# EAGLE board 1020-old (EAGLE 9.5.2)

Size 62 x 17 mm. Coordinates in mm from the lower left corner, seen from the top.
Outline: 0,1.15 12,1.15 12,0.6 19,0.6 19,0 27,0 27,0.6 51.5,0.6 51.5,1.15 62,1.15 62,15.85 51.5,15.85 51.5,16.4 27,16.4 27,17 19,17 19,16.4 12,16.4 12,15.85 0,15.85 0,1.15
Copper layers (1*16): Top 0.035mm / dielectric 1.5mm / Bottom 0.035mm
Design rules "default *": minimum track width 6mil, minimum drill 0.35mm, track to track 6mil, track to pad 6mil, pad to pad 6mil, via to via 6mil, smd to smd 6mil, copper to edge 6mil, drill to drill 6mil, minimum pad ring 10mil, minimum via ring 8mil, stop-mask expansion 4mil, vias tented up to drill 0mil, thermal gap 10mil
Holes 2 mm at 14,4 14.5,15 48,13 21,3 23,3 25,3 21,14 23,14 25,14

## Footprints (pad centres in the part's own frame; a part is rotated, then mirrored left to right if it is on the bottom)
SOIC-4 = smd 1.2 x 1.2: + 1.3,3.05; - -1.3,3.05; ~1 -1.3,-3.05; ~2 1.3,-3.05
C0805 = smd 1.3 x 1.5: 1 -0.95,0; 2 0.95,0
CT3528 = smd 2 x 2.2: + -1.5,0; - 1.5,0
DUOLED-A-3MM = drill 0.8 pad 1.4: 1 -2.54,0; 2 0,0; 3 2.54,0
SOT89 = smd 1 x 1.5: 1 -1.499,-1.981; 3 1.499,-1.981 | smd 1 x 2: 2 0,-1.727 | smd 2.2 x 3.7: 2@1 0,0.94
SOP8 = smd 0.6 x 1.6: 1 -1.905,-2.6; 2 -0.635,-2.6; 3 0.635,-2.6; 4 1.905,-2.6; 5 1.905,2.6; 6 0.635,2.6; 7 -0.635,2.6; 8 -1.905,2.6
1X03 = drill 1.016 pad 1.88: 1 0,0; 2 2.54,0; 3 5.08,0
SMD2,54-5,08 = smd 2.54 x 5.08: 1 0,0
R0805 = smd 1.3 x 1.5: 1 -0.95,0; 2 0.95,0
SOIC127P600X175-14N = smd 1.95 x 0.59: 1 -2.48,3.81; 2 -2.48,2.54; 3 -2.48,1.27; 4 -2.48,0; 5 -2.48,-1.27; 6 -2.48,-2.54; 7 -2.48,-3.81; 8 2.48,-3.81; 9 2.48,-2.54; 10 2.48,-1.27; 11 2.48,0; 12 2.48,1.27; 13 2.48,2.54; 14 2.48,3.81
SOT363 = smd 0.42 x 0.6: P$1 -0.65,0.95; P$2 0,0.95; P$3 0.65,0.95; P$4 0.65,-0.95; P$5 0,-0.95; P$6 -0.65,-0.95
SOT-666 = smd 0.5 x 0.375: P$1 -0.85,0.537; P$2 -0.85,-0.537; P$4 0.85,-0.537; P$5 0.85,0.537 | smd 0.65 x 0.3: P$3 -0.925,0; P$6 0.925,0

## Placement (x,y rotation side)
B1  MB1S  [SOIC-4]  41.95,26.22 90 top  (outside the outline)
C1  0.1u  [C0805]  -26.67,50.8 0 top  (outside the outline)
C3  100n/5V  [C0805]  -40.64,43.18 0 top  (outside the outline)
C4  >10u, >6V  [CT3528]  -41.91,26.67 0 top  (outside the outline)
C6  >1u, >30V  [CT3528]  -52.07,26.67 0 top  (outside the outline)
C7  >1u, >30V  [CT3528]  -19.05,35.56 0 top  (outside the outline)
C8  >1u, >30V  [CT3528]  -29.21,35.56 0 top  (outside the outline)
FRONT  L-115WEGW-CA  [DUOLED-A-3MM]  -7.28,28.86 90 top  (outside the outline)
IC1  78L05F  [SOT89]  -36.83,5.08 0 top  (outside the outline)
IC2  BD6230F  [SOP8]  -45.72,3.81 0 top  (outside the outline)
J1  455-1750-1-ND  [1X03]  6.48,23.85 180 top  (outside the outline)
M-L  [SMD2,54-5,08]  16.35,35.26 90 top  (outside the outline)
M-R  motor  [SMD2,54-5,08]  25.35,27.68 90 top  (outside the outline)
R1  1k  [R0805]  -31.75,50.8 0 top  (outside the outline)
R2  1k  [R0805]  -36.83,50.8 0 top  (outside the outline)
R3  1k  [R0805]  -41.91,50.8 0 top  (outside the outline)
R4  1k  [R0805]  -46.99,50.8 0 top  (outside the outline)
R5  10k  [R0805]  -50.8,43.18 0 top  (outside the outline)
R6  10k  [R0805]  -55.88,43.18 0 top  (outside the outline)
R7  22  [R0805]  -52.07,50.8 0 top  (outside the outline)
R8  10k  [R0805]  -16.51,50.8 0 top  (outside the outline)
R9  6k8  [R0805]  -21.59,50.8 0 top  (outside the outline)
R11  3k3  [R0805]  -45.72,43.18 0 top  (outside the outline)
REAR  L-115WEGW-CA  [DUOLED-A-3MM]  58.17,29.75 270 top  (outside the outline)
TR-L-1  [SMD2,54-5,08]  6.82,33.18 90 top  (outside the outline)
TR-R-1  [SMD2,54-5,08]  49.21,26.28 90 top  (outside the outline)
U2  ATTINY1614-SSNR  [SOIC127P600X175-14N]  -26.67,7.62 0 top  (outside the outline)
U$1  DMN65D8LDW  [SOT363]  -40.64,35.56 0 top  (outside the outline)
U$2  BC857BV  [SOT-666]  -34.29,55.88 0 top  (outside the outline)
U$3  BC847BV  [SOT-666]  -38.1,55.88 0 top  (outside the outline)

## Library data of the parts
B1 = rectifier
C1 = resistor
C3 C4 C6-C8 = rcl; SPICEPREFIX: C
FRONT REAR = led
IC1 = linear
IC2 = rohm; MPN: BD6230F-E2; OC_FARNELL: 1716264; OC_NEWARK: 15R0529
J1 = SparkFun-Connectors; PROD_ID: XXX-00000
M-L M-R TR-L-1 TR-R-1 = wirepad
R1-R9 R11 = rcl; SPICEPREFIX: R
U2 = ATTINY1614-SSNR; AVAILABILITY: Unavailable; DESCRIPTION: AVR tinyAVR™ 1 Microcontroller IC 8-Bit 20MHz 16KB _16K x 8_ FLASH 14-SOIC; MF: Microchip; MP: ATTINY1614-SSNR; PACKAGE: SO-14 Microchip; PRICE: None
U$1-U$3 = Railstars

## Nets
+5V: C3.1 C4.+ IC1.1 J1.2 R7.2 U2.1 U$2.P$1
BEMF: C1.1 R5.2 R6.1 U2.13
COMMAND: R11.1 U2.12
FORWARD: IC2.4 U2.5
GND: B1.- C1.2 C3.2 C4.- C6.- C7.- C8.- IC1.2 IC1.2@1 IC2.8 J1.1 U2.14 U$1.P$3 U$1.P$6 U$3.P$4
LIGHT-B: U2.4 U$1.P$2
LIGHT-F: U2.3 U$1.P$5
M-L: IC2.1 M-L.1 R5.1
M-R: IC2.7 M-R.1 R6.2
N$1: R9.2 U$3.P$5
N$3: R9.1 U$2.P$3 U$3.P$1 U$3.P$2
N$5: R2.1 R4.2 U$1.P$1
N$6: R1.2 REAR.3
N$7: R2.2 REAR.1
N$8: R1.1 R3.2 U$1.P$4
N$9: FRONT.3 R3.1
N$10: FRONT.1 R4.1
N$12: R7.1 U$2.P$2 U$2.P$4
N$14: R8.1 U$2.P$5 U$2.P$6
RAILCOM: R8.2 U2.11
REVERSE: IC2.5 U2.8
RST/UDPI: J1.3 U2.10
TR-L: B1.~1 R11.2 TR-L-1.1 U$3.P$6
TR-R: B1.~2 TR-R-1.1 U$3.P$3
V+: B1.+ C6.+ C7.+ C8.+ FRONT.2 IC1.3 IC2.2 IC2.3 IC2.6 REAR.2

## Tracks (layer width: path | path; a pad name or v marks a point on that pad's centre or on a via)
+5V  (6 unrouted)
BEMF  (3 unrouted)
COMMAND  (1 unrouted)
FORWARD  (1 unrouted)
GND  (14 unrouted)
LIGHT-B  (1 unrouted)
LIGHT-F  (1 unrouted)
M-L  (2 unrouted)
M-R  (2 unrouted)
N$1  (1 unrouted)
N$3  (3 unrouted)
N$5  (2 unrouted)
N$6  (1 unrouted)
N$7  (1 unrouted)
N$8  (2 unrouted)
N$9  (1 unrouted)
N$10  (1 unrouted)
N$12  (2 unrouted)
N$14  (2 unrouted)
RAILCOM  (1 unrouted)
REVERSE  (1 unrouted)
RST/UDPI  (1 unrouted)
TR-L  (3 unrouted)
TR-R  (2 unrouted)
V+  (9 unrouted)